# Altium PCB Probe-Scope v1.0.PcbDoc (part 2 of 2)
Units mil, origin at the board's own origin, x right, y up, seen from the top; angles counter-clockwise.
Board outline 2550 x 850 mil, 6 copper layers (Top Layer, Signal Layer 1, Signal Layer 2, Ground Plane, Power Layer, Bottom Layer), stack 48.468 mil thick; 135 components, 135 nets, 640 pads, 373 vias.
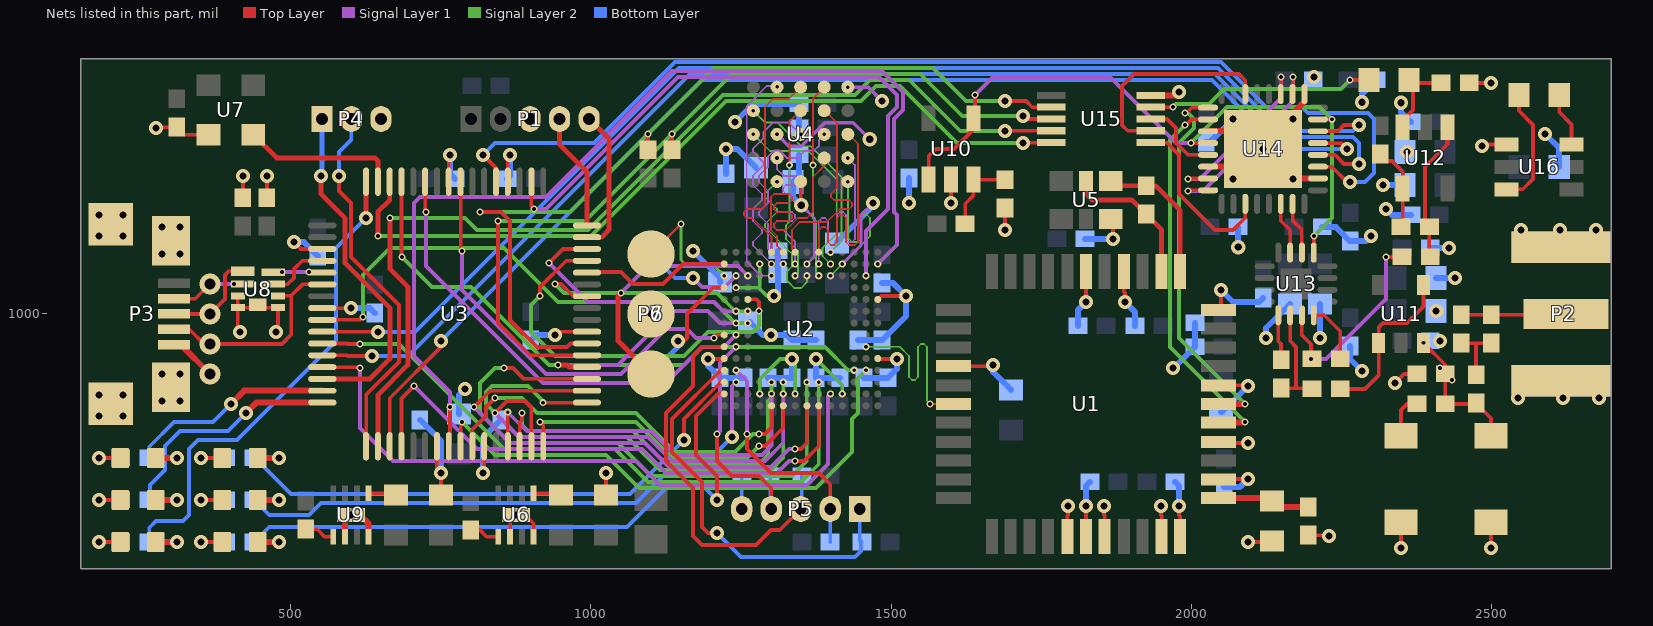
[diagram p6: the nets of this part, all layers, seen from the top]

## Via types
v1: diameter 24, hole 12, Top Layer to Bottom Layer, tented both sides, 222 vias
v2: diameter 12, hole 6, Top Layer to Signal Layer 2, tented both sides, 88 vias
v3: diameter 12, hole 6, Top Layer to Signal Layer 1, tented both sides, 58 vias
v4: diameter 35, hole 19, Top Layer to Bottom Layer, tented both sides, 5 vias

## Nets (pads, with @x,y where several pads share a name; then routed paths per layer and width w, separated by ;. In a path a pad name is that pad's centre, name@x,y a point inside that pad or via, vN(x,y) a via of type N, cw(c..) or ccw(c..) an arc to the next point about the centre after c; other vN are vias at no path point) (continued)
ADC_DCO_P: U1.17 U2.N6 | length 337.5
  Top Layer w3: v2(1565,850) U1.17@1604,850
  Signal Layer 2 w3: v2(1458.27,945.47) 1514.53,945.47 1530,930 1530,895 1535,890 1540,890 1545,895 1545,945 1550,950 1555,950 1560,945 1560,855 v2(1565,850)
ADC_OSC_N: R1.2 U1.2 U5.5 | length 241.2
  Top Layer w8: U5.5@1825,1221.5 1825,1200 1835,1190 1901.38,1190 R1.2@1925,1166.38 1951,1140.38 ; U1.2@1951,1071 1951,1140
ADC_OSC_P: R1.1 U1.1 U5.4 | length 237.7
  Top Layer w8: U5.4@1866.34,1221.5 1874.21,1213.62 R1.1@1925,1213.62 1941.38,1213.62 1982,1173 U1.1@1982,1071
D+: P3.3 U8.1 | length 167.5
  Top Layer w6: P3.3@305,1000 v4(365,1000) 390,1025 390,1065 396.5,1071.5 U8.1@419.41,1071.5
D+_filt: U3.37 U8.8 | length 45
  Signal Layer 1 w6: v3(485,1070) v3(530,1070)
D-: P3.2 U8.2 | length 110.1
  Top Layer w6: P3.2@305,1025.59 340.59,1025.59 v4(365,1050)
  Signal Layer 1 w6: v4(365,1050) v3(405,1050)
D-_filt: U3.36 U8.7 | length 122
  Top Layer w3: U8.7@455.16,1049.84 U8.7@470.59,1049.84
  Top Layer w6: U8.7@470.59,1049.84 494.84,1049.84 505,1060 505,1075 518.58,1088.58 U3.36@552.33,1088.58
DAC_RDY: U3.30 U15.5 | length 1364.1
  Top Layer w6: v1(1720,1285) 1720.63,1285.63 U15.5@1767.32,1285.63
  Top Layer w8: v2(645,1130) 645,1170 664.53,1189.53 U3.30@664.53,1220.47
  Signal Layer 2 w6: v2(645,1130) 1000,1130 1225,1355 1450,1355 1475,1380 1515.15,1380 1610.15,1285 v1(1720,1285)
FDIO0_N: P6.3 U2.B12 | length 151
  Signal Layer 1 w6: v1(1170,1060) 1185,1045 1223.15,1045 v2(1241.73,1063.58)
  Bottom Layer w6: P6.3@1115,1085 1140,1060 v1(1170,1060)
FDIO0_P: P6.1 U2.A11 | length 210.9
  Top Layer w6: v1(1145,955) 1155,955 1160,960 1160,1000 1203.9,1043.9 U2.A11@1222.05,1043.9
  Bottom Layer w8: P6.1@1100,900 1145,945 v1(1145,955)
FDIO1_N: P7.3 U2.A12 | length 213.7
  Top Layer w5: P7.3@1100,1100 v2(1150,1150)
  Signal Layer 2 w5: v2(1150,1150) 1150,1090 1160,1080 1205.63,1080 v2(1222.05,1063.58)
FDIO1_P: P7.1 U2.C12 | length 396.7
  Top Layer w8: v3(1050,1035) 1045,1030 1045,955 P7.1@1100,900
  Signal Layer 1 w6: v3(1050,1035) 1095,1080 1245,1080 v3(1261.42,1063.58)
FJ_TCK: P5.4 R15.2 U2.B6 | length 403.2
  Top Layer w6: v3(1210,800) 1210,755 1235,730 1280,730 1300.39,709.61 P5.4@1300.39,675
  Signal Layer 1 w6: v3(1210,800) 1215,805 1215,918.74 v3(1241.73,945.47)
  Bottom Layer w6: R15.2@1298.62,730 1298.62,676.77 P5.4@1300.39,675
FJ_TDI: P5.2 R13.1 U2.B4 | length 398.1
  Top Layer w6: v3(1260,800) 1260,775 1300,735 1380,735 1398.82,716.18 P5.2@1398.82,675
  Signal Layer 1 w6: v3(1241.73,906.1) 1260,887.83 v3(1260,800)
  Bottom Layer w6: R13.1@1398.62,620 1398.82,620.2 P5.2@1398.82,675
FJ_TDO: P5.1 R12.1 U2.A4 | length 683.2
  Top Layer w6: v1(1210,635) 1195,635 1185,645 1185,720 1135,770 1135,825 1216.1,906.1 U2.A4@1222.05,906.1
  Bottom Layer w6: v1(1210,635) 1250,595 1440,595 1450,605 1450,618.62 R12.1@1451.38,620 1448.03,623.35 P5.1@1448.03,675
FJ_TMS: P5.3 R14.1 U2.A6 | length 662.1
  Top Layer w6: U2.A6@1222.05,945.47 1185.47,945.47 1170,930 1170,880 1125,835 1125,755 1170,710 1170,630 1185,615 1275,615 1300,640 1314.61,640 P5.3@1349.61,675
  Bottom Layer w6: P5.3@1349.61,675 1351.38,676.77 R14.1@1351.38,730
FLED0: R9.2 U2.A3 | length 904.6
  Top Layer w6: v1(1155,790) 1155,825 1216.42,886.42 U2.A3@1222.05,886.42
  Bottom Layer w6: R9.2@440,760 500,700 1065,700 v1(1155,790)
FLED1: R10.2 U2.B3 | length 964.8
  Signal Layer 1 w6: v1(1235,795) 1235,879.69 v3(1241.73,886.42)
  Bottom Layer w6: R10.2@438.62,690 463.62,665 530,665 550,685 1075,685 1150,760 1200,760 v1(1235,795) ; R10.2@440,690 R10.2@450,690
FLED2: R11.2 U2.A2 | length 1037.8
  Top Layer w6: v1(1210,690) 1210,730 1175,765 1175,830 1211.73,866.73 U2.A2@1222.05,866.73
  Bottom Layer w6: R11.2@438.62,620 463.62,645 1060,645 1130,715 1185,715 v1(1210,690)
FPGA_DONE: U2.C10 U3.13 | length 655.1
  Top Layer w6: v2(915,1030) 915,1045 958.58,1088.58 U3.13@993.28,1088.58 ; U2.C10@1261.42,1024.21 1275.79,1024.21 1280,1020 v2(1280,1005)
  Signal Layer 2 w6: v2(915,1030) 900,1015 900,970 940,930 1155,930 1195,970 1270,970 1280,980 v2(1280,1005)
FPGA_I\N\I\T\: U2.B9 U3.14 | length 418
  Top Layer w6: v3(930,1085) 953.27,1108.27 U3.14@993.28,1108.27
  Signal Layer 1 w6: v3(930,1085) 995,1020 1205,1020 1220.47,1004.53 v3(1241.73,1004.53)
FPGA_P\R\O\G\R\A\M\: U2.A13 U3.12 | length 249.1
  Top Layer w6: U3.12@995,1070 1035,1070 1040,1070 1050,1070 1070,1050 1120,1050 1153.27,1083.27 U2.A13@1222.05,1083.27
FPIO0: U2.A7 U3.24 | length 714.9
  Top Layer w6: v3@782.65,1105 U3.24@782.65,1220.47 ; v3(1205,960) 1210.16,965.16 U2.A7@1222.05,965.16
  Signal Layer 1 w6: v3(785,1105) 785,1040 925,900 1050,900 1125,975 1160,975 1175,960 v3(1205,960)
FPIO1: U2.B7 U3.27 | length 771.8
  Top Layer w6: U3.27@723.59,1220.47 723.59,1171.41 v3(725,1170)
  Signal Layer 1 w6: v3(725,1170) 725,1080 920,885 1125,885 1185,945 1221.57,945 v3(1241.73,965.16)
FPIO2: U2.C8 U3.41 | length 851.6
  Top Layer w6: U3.41@552.33,990.16 615.16,990.16 v2(620,995)
  Signal Layer 2 w6: v2(620,995) 620,1065 665,1110 855,1110 945,1020 1205,1020 1240.16,984.84 v2(1261.42,984.84)
FPIO3: U2.B8 U3.4 | length 392.1
  Top Layer w8: v3(945,915) 960,915 963.58,911.42 U3.4@993.28,911.42
  Signal Layer 1 w6: v3(945,915) 1045,915 1135,1005 1195,1005 1215.16,984.84 v3(1241.73,984.84)
FPIO4: U2.C9 U3.10 | length 402
  Top Layer w6: v2(940,1050) 950,1050 970.47,1029.53 U3.10@993.28,1029.53
  Signal Layer 2 w6: v2(940,1050) 955,1035 1210,1035 1240.47,1004.53 v2(1261.42,1004.53)
GND: C1.1 C2.1 C3.1 C4.1 C5.1 C6.1 C7.1 C8.1 C9.1 C10.1 C11.1 C12.1 C13.1 C14.1 C15.1 C16.1 C17.1 C18.1 C19.1 C20.1 C21.1 C22.1 C23.1 C24.1 C25.1 C26.1 C27.1 C28.1 C29.1 C30.1 C31.1 C32.1 C33.1 C34.1 C35.1 C36.1 C37.1 C38.1 C39.1 C40.1 C41.1 C42.1 C43.1 C44.1 C45.1 C46.1 C47.1 C48.1 C49.1 C50.1 C51.1 C52.1 C53.1 C54.1 C55.1 C56.1 C57.1 C58.1 C59.1 C60.1 C61.1 C62.1 C63.1 C64.1 C65.1 C66.1 C67.1 C68.1 C70.1 C72.1 C74.1 C75.1 D1.2 D2.2 D3.2 D5.2 D6.2 D7.2 P1.3 P2.2 P3.5 P3.6 P4.3 P5.5 P6.2 P7.2 R7.1 R15.1 R27.1 U1.4 U1.6 U1.15 U1.27 U1.28 U1.29 U1.32 U1.33 U1.35 U1.37 U1.40 U1.44 U2.A5 U2.B11 U2.D2 U2.D13 U2.G2 U2.H13 U2.L2 U2.L13 U2.P5 U2.P10 U3.7 U3.20 U3.25 U3.35 U3.40 U3.55 U3.59 U4.B3 U4.C1 U4.E5 U5.3 U6.6 U6.8 U6.9 U7.2 U8.0 U8.3 U8.4 U8.5 U9.6 U9.8 U9.9 U10.2 U14.2 U14.9 U14.19 U14.22 U14.33 U15.10 U16.1 | length 6716.2
  Top Layer w6: v1(275,1310) 276.38,1311.38 C10.1@310,1311.38 322.72,1298.66 U7.2@362.6,1298.66 ; U8.4@411.54,1010.47 U8.5@478.46,1010.47 478.46,973.46 v1(475,970) ; U8.3@411.54,1030.16 411.54,973.46 v1(415,970) ; C12.1@420,1193.62 v1(420,1230) ; C13.1@460,1193.62 v1(460,1230) ; v1(505,1120) 516.73,1108.27 U3.35@552.33,1108.27 ; U3.40@552.33,1009.84 599.84,1009.84 v1(600,1010) ; U3.55@743.28,779.53 743.28,741.72 v1(750,735) C70.1@750,698.46 ; U3.25@762.96,1220.47 762.96,1262.96 v1(765,1265) ; v1(820,735) 822.02,737.02 U3.59@822.02,779.53 ; U3.20@861.39,1220.47 861.39,1261.39 v1(865,1265) ; U6.6@865.16,628.98 865.16,655.16 v1(875,665) 890,665 904.53,650.47 U6.8@904.53,628.98 ; v1(940,965) 945.47,970.47 U3.7@993.28,970.47 ; C25.1@1025,698.46 v1(1025,735) ; v1(1195,925) 1222.83,925 U2.A5@1222.05,925.79 ; U4.C1@1349.37,1220.63 1349.37,1182.13 v1(1350.39,1181.1) ; U2.P5@1477.95,925.79 1478.74,925 v1(1510,925) ; U2.P10@1477.95,1024.21 1483.74,1030 v1(1525,1030) ; v1(1600,1185) U10.2@1600,1223.82 ; U1.15@1604,913 1668,913 v1(1670,915) ; v1(1690,1140) R7.1@1690,1176.38 ; U1.27@1794,629 1794,664 1795,665 v1(1795,680) ; U1.28@1825,629 v1(1825,680) ; v1(1825,1020) U1.6@1825,1071 ; v1(1855,680) 1855,665 1856,664 U1.29@1856,629 ; U5.3@1866.34,1158.5 1870,1154.84 v1(1870,1125) ; U1.4@1888,1071 1888,1037 1890,1035 v1(1890,1020) ; v1(1950,680) 1950,665 1951,664 U1.32@1951,629 ; v1(1980,680) 1980,665 1982,663 U1.33@1982,629 ; U1.35@2046,724 2047,725 v1(2095,725) ; U1.37@2046,787 2044,785 v1(2095,785) ; U1.40@2046,881 2084,881 2090,887 2095,882 v1(2095,880) ; U1.44@2046,1007 2048,1007 2050,1005 v1(2050,1040) ; v1(2095,620) 2133.46,620 C24.1@2135,621.54 ; C9.1@2195,631.38 2228.62,631.38 v1(2230,630) ; v1(2340,885) 2355,900 R27.1@2376.38,900 ; v1(2350,610) C75.1@2350,652.66 ; C35.1@2463.62,1385 v1(2500,1385) ; v1(2485,1280) 2487.4,1282.4 U16.1@2525.87,1282.4 ; v1(2500,610) C74.1@2500,652.66
  Top Layer w10: D3.2@274.53,620 v1(310,620) ; D2.2@274.53,690 v1(310,690) ; D1.2@274.53,760 v1(310,760) ; P3.5@305,948.82 316.18,948.82 v4(365,900) ; D7.2@444.53,620 v1(480,620) ; D6.2@444.53,690 v1(480,690) ; D5.2@444.53,760 v1(480,760) ; U9.6@590.16,628.98 590.16,655.16 v1(600,665) 615,665 629.53,650.47 U9.8@629.53,628.98 ; v1@1165,1100 v1(1170,1105) ; U15.10@1932.68,1364.37 1974.37,1364.37 v1(1980,1370) ; U14.22@2028.46,1245.47 2090.47,1245.47 v1(2120,1275) ; U14.19@2028.46,1304.53 2090.47,1304.53 v1(2120,1275) ; U14.9@2188.9,1366.54 2188.9,1353.9 2120,1285 v1(2120,1275) ; U14.2@2211.54,1225.79 2169.21,1225.79 v1(2120,1275)
  Signal Layer 1 w5: v1(1350.39,1181.1) 1372.5,1159 1372.5,1095.93 v3(1359.84,1083.27) ; v3(1418.9,1083.27) 1449.77,1114.14 1449.77,1164.77 v1(1470,1185)
  Signal Layer 1 w6: v2(1310,1299.37) 1329.84,1279.53 1350.39,1279.53 1389.76,1318.9 1437.01,1318.9 v1(1464.57,1291.34) ; v2(1428.11,1378.11) 1461.89,1378.11 v1(1485,1355)
  Signal Layer 2 w6: v2(1241.73,1043.9) 1279.53,1043.9 ; v2(1281.1,866.73) 1281.1,891.1 1315,925 1334.84,925 v1@1335,924.84 ; v2(1281.1,1083.27) 1281.1,1045.47 1279.53,1043.9 ; v1(1305,1030) 1293.43,1030 1279.53,1043.9 ; v1(1335,925) v1@1335,924.84 ; v2(1340.16,866.73) 1340.16,919.68 v1@1335,924.84 ; v1@1375.16,924.84 1418.9,881.1 v2(1418.9,866.73)
  Bottom Layer w6: P5.5@1251.18,675 1251.38,675.2 R15.1@1251.38,730
  Bottom Layer w10: v1(505,1120) 521.38,1120 C18.1@545,1096.38 ; v1(600,1010) 631.38,1010 C19.1@640,1001.38 ; C16.1@715,823.62 750,788.62 v1(750,735) ; v1(765,1265) 765,1233.62 C14.1@773.62,1225 ; C30.1@780,833.46 780,865 v1(790,875) ; v1(820,735) 820,793.62 C15.1@850,823.62 ; C17.1@860,1225 865,1230 v1(865,1265) ; C20.1@900,956.38 908.62,965 v1(940,965) ; v1@1165,1100 v1(1170,1105) 1215,1060 C57.1@1215,1053.46 ; v1(1195,925) 1195,913.62 C47.1@1215,893.62 C48.1@1255,893.62 ; C51.1@1225,1233.62 v1(1225,1275) 1243.46,1275 C53.1@1275,1243.46 ; v1(1240,1320) 1270,1350 C23.1@1346.38,1350 C21.1@1346.38,1310 ; C61.1@1265,986.54 1286.54,965 v1(1300,965) 1326.38,965 C59.1@1335,956.38 C43.1@1375,956.38 ; C56.1@1295,893.62 C60.1@1335,893.62 v1(1335,925) ; v1(1305,1030) 1311.38,1036.38 C52.1@1311.38,1065 C50.1@1311.38,1105 ; C22.1@1346.38,1265 1346.38,1229.84 C29.1@1336.54,1220 1336.54,1194.96 v1(1350.39,1181.1) ; v1(1375,925) C41.1@1375,893.62 C44.1@1415,893.62 ; C49.1@1410,1118.46 1410,1120 1470,1180 v1(1470,1185) ; C55.1@1445,956.38 C58.1@1485,956.38 1525,996.38 v1(1525,1030) 1503.62,1051.38 C54.1@1485,1051.38 ; C42.1@1455,893.62 C46.1@1495,893.62 1510,908.62 v1(1510,925) ; v1(1530,1185) C64.1@1530,1226.38 ; v1@1670,903.46 C28.1@1700,873.46 ; C1.1@1811.38,980 1811.38,1006.38 v1(1825,1020) ; C8.1@1823.62,1125 v1(1870,1125) ; v1(1825,680) 1825,713.62 C7.1@1831.38,720 ; v1(1890,1020) 1906.38,1003.62 C5.1@1906.38,980 ; v1(1970,910) 1971.38,910 C2.1@2006.38,945 C3.1@2006.38,985 ; C4.1@1973.62,720 1980,713.62 v1(1980,680) ; C11.1@2025,1286.38 2031.38,1286.38 v1(2070,1325) ; C27.1@2050,836.54 2051.54,836.54 v1(2095,880) ; v1(2050,1040) 2070,1020 2113.62,1020 C38.1@2120,1026.38 ; C6.1@2055,711.38 2081.38,711.38 v1(2095,725) ; v1(2078.62,1111.38) C34.1@2078.62,1145 ; v1(2125,960) 2125,976.54 C39.1@2165,1016.54 ; v1(2215,960) C37.1@2215,1016.54 ; C31.1@2218.62,1145 2241.38,1145 C33.1@2265,1121.38 2291.38,1121.38 v1(2300,1130) ; C36.1@2265,946.38 2265,925 v1(2285,905) ; v1(2285,1353) 2285,1366.38 C32.1@2308.62,1390 ; v1(2320,1215) C62.1@2356.54,1215 ; v1(2325,1175) 2335,1165 C40.1@2366.38,1165 ; v1(2350,1352) 2350,1336.38 C65.1@2366.38,1320 ; C45.1@2398.62,1110 v1(2430,1110) ; C63.1@2408.46,1060 v1(2440,1060) ; v1(2590,1300) 2613.46,1276.54 C72.1@2613.46,1245
  other v1: 180,830 220,830 285,855 315,855 2545,860 2620,860 2680,860 180,865 220,865 285,900 315,900 2415,955 1100,1000 2408.46,1005 285,1100 315,1100 180,1130 220,1130 2550,1140 2615,1140 2675,1140 285,1145 315,1145 180,1165 220,1165 2070,1225 2170,1225 2360,1270 2170,1325 2205,1395
L\D\A\C\: U3.50 U15.4 | length 1663.2
  Top Layer w6: v1(1690,1305) 1690.31,1305.31 U15.4@1767.32,1305.31
  Top Layer w8: U3.50@644.85,779.53 644.85,864.85 695,915 695,1045 665,1075 v2(665,1160)
  Signal Layer 2 w6: v2(665,1160) 790,1160 810,1140 995,1140 1220,1365 1440,1365 1465,1390 1530.6,1390 1615.6,1305 v1(1690,1305)
LED0: R4.1 U3.47 | length 350.2
  Top Layer w10: v1(400,850) 422.05,872.05 U3.47@552.33,872.05
  Bottom Layer w6: R4.1@273.62,760 263.62,770 263.62,778.62 305,820 370,820 v1(400,850)
LED1: R5.1 U3.48 | length 392.7
  Top Layer w10: v1(425,835) 442.36,852.36 U3.48@552.33,852.36
  Bottom Layer w6: R5.1@265,690 265,715 290,740 290,780 315,805 395,805 v1(425,835)
LED2: R6.1 U3.32 | length 814.7
  Top Layer w8: v1(625,1160) 625.16,1160.16 U3.32@625.16,1220.47
  Bottom Layer w6: R6.1@263.62,620 263.62,643.62 275,655 320,655 330,665 330,775 345,790 410,790 575,955 575,1110 v1(625,1160)
MEM_C\S\: U2.K13 U4.A3 | length 326.3
  Signal Layer 2 w3: v2(1270.63,1299.37) 1298.35,1271.65 1362.2,1271.65 1409.45,1224.41 1409.45,1133.86 1385.83,1110.24 1385.83,1096.65 v2(1399.21,1083.27)
MEM_CK_N: U2.H12 U4.B1 | length 265.1
  Signal Layer 2 w3: v2(1310,1220.63) 1290,1200.63 1290,1195 1310,1175 1310,1170 1290,1150 1290,1145 1335,1100 1335,1079.09 1326.77,1070.87 1326.77,1055.12 1338.58,1043.31 1350.39,1043.31 1359.84,1052.76 v2(1359.84,1063.58)
MEM_CK_P: U2.G13 U4.B2 | length 353.8
  Signal Layer 1 w3: v3(1310,1260) 1310,1241.18 1321.18,1230 1350,1230 1355,1225 1355,1220 1350,1215 1325,1215 1320,1210 1320,1205 1325,1200 1330,1200 1335,1195 1335,1190 1330,1185 1310,1185 1305,1180 1305,1175 1310,1170 1335,1170 1340,1165 1340,1160 1335,1155 1310,1155 1305,1150 1305,1145 1310,1140 1320.63,1140 1340.16,1120.47 v3(1340.16,1083.27)
MEM_D0: U2.F13 U4.D3 | length 339.7
  Signal Layer 1 w3: v2(1320.47,1083.27) 1295,1108.74 1295,1150 1280,1165 1280,1170 1295,1185 1295,1205 1280,1220 1280,1230 1295,1245 1295,1262.52 1305.12,1272.64 1313.9,1272.64 1326.54,1260 1345,1260 1357.52,1272.52 1372.52,1272.52 1380,1280 1380,1290 v2@1388.74,1298.74
  other v2: 1388.74,1299.37
MEM_D1: U2.F14 U4.D2 | length 440.2
  Top Layer w3: U2.F14@1320.47,1102.95 1310,1113.43 1310,1130 1300,1140 1300,1195 1305,1200 1330,1200 1335,1195 1335,1190 1330,1185 1310,1185 1305,1180 1305,1175 1310,1170 1330,1170 1335,1165 1335,1160 1330,1155 1310,1155 1305,1150 1305,1145 1310,1140 1325,1140 1345,1160 1360,1160 1370,1170 1370,1228.27 1389.37,1247.64 U4.D2@1389.37,1260.63
MEM_D2: U2.G12 U4.C4 | length 295.5
  Top Layer w3: v2(1330.71,1248.03) 1330.71,1320.08 U4.C4@1349.37,1338.74
  Signal Layer 2 w3: v2(1330.71,1248.03) 1330.71,1153.54 1325,1147.83 1325,1125 1345,1105 1345,1068.43 v2(1340.16,1063.58)
MEM_D3: U2.G14 U4.D4 | length 357
  Top Layer w3: U2.G14@1340.16,1102.95 1335,1108.11 1335,1140 1348.24,1153.24 1393.24,1153.24 1415,1175 1430,1175 1435,1180 1435,1185 1430,1190 1405,1190 1400,1195 1400,1200 1410,1210 1410,1318.74 U4.D4@1389.37,1339.37
MEM_D4: U2.J12 U4.D5 | length 326.2
  Top Layer w3: v2(1370.08,1248.03) 1370.08,1359.45 U4.D5@1388.74,1378.11
  Signal Layer 2 w3: v2(1370.08,1248.03) 1370.08,1159.92 1375,1155 1375,1068.11 v2(1379.53,1063.58)
MEM_D5: U2.J14 U4.E3 | length 405.5
  Top Layer w3: U2.J14@1379.53,1102.95 1379.53,1139.53 1385,1145 1390,1145 1395,1140 1395,1120 1400,1115 1405,1115 1410,1120 1410,1160 1415,1165 1420,1165 1425,1160 1425,1120 1430,1115 1440,1115 1445,1120 1445,1283.74 U4.E3@1428.74,1300
MEM_D6: U2.J13 U4.E2 | length 408.4
  Signal Layer 1 w3: v3(1379.53,1083.27) 1379.53,1154.53 1385,1160 1390,1160 1395,1155 1395,1120 1400,1115 1405,1115 1410,1120 1410,1165 1415,1170 1420,1170 1425,1165 1425,1125 1430,1120 1435,1120 1440,1125 1440,1248.11 v2(1428.11,1260)
MEM_D7: U2.K12 U4.E1 | length 298.4
  Signal Layer 2 w3: v2(1399.21,1063.58) 1465,1129.37 1465,1160 1460,1165 1455,1165 1450,1160 1450,1125 1445,1120 1435,1120 1428.11,1126.89 v2(1428.11,1220.63)
MEM_PSC_N: U2.E14 U4.C5 | length 369.6
  Top Layer w3: U2.E14@1300.79,1102.95 1300.79,1128.35 1269.13,1160 1260,1160 1255,1165 1255,1170 1260,1175 1285,1175 1290,1180 1290,1345.12 1303.15,1358.27 1329.53,1358.27 U4.C5@1350,1378.74
MEM_PSC_P: U2.E12 U4.B5 | length 374.7
  Signal Layer 1 w3: v3(1300.79,1063.58) 1282.87,1063.58 1259.5,1086.96 1259.5,1346.11 1293.39,1380 v2@1310,1380
  other v2: 1310.63,1378.74
MEM_R\E\S\E\T\: U2.K14 U4.A4 | length 325.3
  Signal Layer 2 w3: v2(1270.63,1338.74) 1290.47,1318.9 1311.02,1318.9 1350.39,1279.53 1366.14,1279.53 1417.32,1228.35 1417.32,1121.06 v2(1399.21,1102.95)
MEM_RWDS: U2.E13 U4.C3 | length 356
  Top Layer w3: U4.C3@1349.37,1299.37 U4.C3@1349.37,1299.37 v2(1349.41,1299.21)
  Signal Layer 1 w3: v2(1300.79,1083.27) 1270,1114.06 1270,1120 1285,1135 1285,1140 1270,1155 1270,1175 1285,1190 1285,1200 1270,1215 1270,1230 1287.4,1247.4 1287.4,1252.6 1270,1270 1270,1275 1287.4,1292.4 1287.4,1303.15 1303.15,1318.9 1329.72,1318.9 v2(1349.41,1299.21)
NetC35_2: C35.2 R8.2 U12.3 | length 159.1
  Top Layer w6: U12.3@2352.6,1311.18 2352.6,1322.6 2370,1340 2370,1378.46 R8.2@2363.46,1385 ; R8.2@2352.6,1379.13 R8.2@2363.46,1390 R8.2@2363.46,1385 ; C35.2@2416.38,1380 2411.38,1385 R8.2@2363.46,1385
NetC69_1: C69.1 U9.5 | length 50.6
  Top Layer w6: C69.1@525,641.38 543.62,641.38 556.02,628.98 U9.5@570.47,628.98
NetC71_1: C71.1 U6.5 | length 50
  Top Layer w6: C71.1@800,640 815,640 826.02,628.98 U6.5@845.47,628.98
NetC73_1: C73.1 U16.3 | length 201.1
  Top Layer w6: U16.3@2525.87,1207.6 2552.6,1207.6 2570,1225 2570,1315 2546.54,1338.46 C73.1@2546.54,1365
NetC73_2: C73.2 U16.6 | length 91.2
  Top Layer w6: C73.2@2613.46,1365 2613.46,1336.54 2634.13,1315.87 U16.6@2634.13,1282.4
NetC74_2: C74.2 R26.1 R27.2 R28.2 U11.3 | length 233.1
  Top Layer w6: v3(2387.4,951.77) 2423.62,915.55 R28.2@2423.62,850 2473.62,850 R26.1@2475,851.38 2500,826.38 C74.2@2500,797.34
  other v3: 2435,890 2415,910
NetC75_2: C75.2 R28.1 | length 73.2
  Top Layer w6: C75.2@2350,797.34 2350,840 2360,850 R28.1@2376.38,850
NetD1_1: D1.1 R4.2 | length 71.9
  Top Layer w6: v1(180,760) D1.1@215.47,760
  Bottom Layer w6: v1(180,760) R4.2@216.38,760
NetD2_1: D2.1 R5.2 | length 71.9
  Top Layer w6: v1(180,690) D2.1@215.47,690
  Bottom Layer w6: v1(180,690) R5.2@216.38,690
NetD3_1: D3.1 R6.2 | length 71.9
  Top Layer w6: v1(180,620) D3.1@215.47,620
  Bottom Layer w6: v1(180,620) R6.2@216.38,620
NetD5_1: D5.1 R9.1 | length 76.9
  Top Layer w6: v1(350,760) D5.1@385.47,760
  Bottom Layer w6: v1(350,760) R9.1@391.38,760
NetD6_1: D6.1 R10.1 | length 76.9
  Top Layer w6: v1(350,690) D6.1@385.47,690
  Bottom Layer w6: v1(350,690) R10.1@391.38,690
NetD7_1: D7.1 R11.1 | length 76.9
  Top Layer w6: v1(350,620) D7.1@385.47,620
  Bottom Layer w6: v1(350,620) R11.1@391.38,620
NetL1_1: L1.1 U9.1 | length 46.5
  Top Layer w6: U9.1@629.53,701.02 672.44,701.02 L1.1@675,698.46
NetL2_1: L2.1 U6.1 | length 46.5
  Top Layer w6: U6.1@904.53,701.02 947.44,701.02 L2.1@950,698.46
NetP2_1: P2.1 R24.2 R25.2 | length 175.6
  Top Layer w6: R25.2@2450,998.62 2623.62,998.62 P2.1@2625,1000
NetR2_1: R2.1 R7.2 U10.3 | length 117.2
  Top Layer w6: 1623.62,1165 1623.62,1183.62 1637.4,1197.4 U10.3@1637.4,1223.82 1689.8,1223.82 R7.2@1690,1223.62
NetR8_1: R8.1 U15.9 | length 382.6
  Top Layer w6: U15.9@1932.68,1344.69 1969.69,1344.69 v2(1970,1345) ; v2(2265,1390) R8.1@2296.54,1390
  Signal Layer 2 w6: v2(1970,1345) 1975,1350 2030,1350 2055,1375 2250,1375 v2(2265,1390)
NetR18_2: R18.2 R19.1 U12.4 | length 143.1
  Top Layer w6: R18.2@2315,1266.38 2326.38,1255 2335,1255 2352.6,1237.4 U12.4@2352.6,1208.82 2352.6,1147.6 R19.1@2350,1145
NetR19_2: R19.2 R20.1 U12.1 | length 235.2
  Top Layer w6: R20.1@2398.62,1095 2397.24,1096.38 R19.2@2397.24,1145 2390,1152.24 2390,1245.46 2427.4,1282.86 U12.1@2427.4,1311.18
NetR20_2: R20.2 R21.1 U13.3 | length 341.9
  Top Layer w6: U13.3@2184.84,997.83 2184.84,964.7 2200,949.54 v3(2200,925) ; v3(2325,1095) R20.2@2351.38,1095
  Signal Layer 1 w6: v3(2200,925) 2225,925 2325,1025 v3(2325,1095)
NetR21_2: R21.2 U13.4 | length 101.4
  Top Layer w6: U13.4@2204.53,997.83 2222.17,997.83 2248.62,971.38 R21.2@2248.62,925
NetR22_1: R22.1 U11.1 U11.4 | length 278.4
  Top Layer w6: R22.1@2248.62,875 2290,875 2312.6,897.6 U11.1@2312.6,951.77 2312.6,977.6 2320,985 2360,985 2387.4,1012.4 U11.4@2387.4,1048.23
NetR22_2: R22.2 R23.1 U13.2 | length 177.5
  Top Layer w6: R23.1@2150,876.38 2175,876.38 ; U13.2@2165.16,997.83 2165.16,954.84 2175,945 2175,876.38 ; R22.2@2201.38,875 2200,876.38 2175,876.38
NetR23_2: R23.2 U13.1 | length 76.1
  Top Layer w6: U13.1@2145.47,997.83 2145.47,954.53 2150,950 R23.2@2150,923.62
NetR24_1: R24.1 R25.1 R26.2 | length 102.8
  Top Layer w6: R25.1@2450,951.38 2475,951.38 ; R26.2@2475,898.62 2475,951.38 ; R24.1@2500,951.38 2475,951.38
NetU13_10: U13.10 U14.31 | length 87.8
  Top Layer w6: U14.31@2169.21,1183.46 2169.21,1155.79 2184.84,1140.16 U13.10@2184.84,1102.17
NetU13_11: U13.11 U14.30 | length 87.8
  Top Layer w6: U14.30@2149.53,1183.46 2149.53,1155.47 2165.16,1139.84 U13.11@2165.16,1102.17
NetU14_10: U14.10 U14.24 | length 339.8
  Top Layer w6: v3(1995,1205) 1996.1,1206.1 U14.24@2028.46,1206.1 ; U14.10@2169.21,1366.54 2169.21,1394.21 v3(2170,1395)
  Signal Layer 1 w6: v3(1995,1205) 2020,1205 2170,1355 v3(2170,1395)
NetU14_11: U14.11 U14.23 | length 308.4
  Top Layer w6: v3(1995,1225) 1995.79,1225.79 U14.23@2028.46,1225.79 ; U14.11@2149.53,1366.54 2149.53,1394.53 v3(2150,1395)
  Signal Layer 1 w6: v3(1995,1225) 2015,1225 2150,1360 v3(2150,1395)
NetU14_14: U14.14 U15.7 | length 357.8
  Top Layer w6: U15.7@1932.68,1305.31 1894.69,1305.31 1885,1315 1885,1380 1905,1400 2080,1400 2090.47,1389.53 U14.14@2090.47,1366.54
NetU14_21: U14.21 U15.8 | length 135.2
  Top Layer w6: U15.8@1932.68,1325 1960,1325 1975,1310 1975,1285 1994.84,1265.16 U14.21@2028.46,1265.16
NetU14_27: U14.27 U15.6 | length 287.7
  Top Layer w6: U15.6@1932.68,1285.63 1959.37,1285.63 1980,1265 1980,1200 2040,1140 2070,1140 2090.47,1160.47 U14.27@2090.47,1183.46
OSC24: U3.31 U7.3 | length 260.1
  Top Layer w8: U7.3@437.4,1298.66 476.06,1260 640,1260 644.85,1255.15 U3.31@644.85,1220.47
PGC: P1.5 U3.15 | length 240.4
  Top Layer w8: U3.15@993.28,1127.95 1017.95,1127.95 1030,1140 1030,1291.85 P1.5@996.85,1325
PGD: P1.4 U3.16 | length 196.3
  Top Layer w8: P1.4@947.64,1325 947.64,1282.36 993.28,1236.72 U3.16@993.28,1147.64
PMCS1: U2.K2 U3.45 | length 1115.6
  Top Layer w6: U3.45@552.33,911.42 613.58,911.42 v3(615,910)
  Signal Layer 1 w6: v3(615,910) 615,810 670,755 1075,755 1115,715 1360,715 1395,750 1395,862.52 v3(1399.21,866.73)
PMD0: U2.E1 U3.58 | length 647.3
  Top Layer w6: U3.58@802.33,779.53 802.33,807.33 825,830 825,845 v2(840,860) ; v2(1280,800) 1290,800 1300.79,810.79 U2.E1@1300.79,847.05
  Signal Layer 2 w6: v2(840,860) 885,860 910,835 1075,835 1140,770 1240,770 1270,800 v2(1280,800)
PMD1: U2.E2 U3.61 | length 618.3
  Top Layer w6: U3.61@861.39,779.53 v3(861.39,836.39)
  Signal Layer 1 w6: v3(861.39,836.39) 892.77,805 1100,805 1140,765 1285,765 1300.79,780.79 v3(1300.79,866.73)
PMD2: U2.E3 U3.62 | length 644.1
  Top Layer w6: U3.62@881.07,779.53 881.07,818.93 885,822.86 v2(885,835)
  Signal Layer 2 w6: v2(885,835) 885,815 895,805 1070,805 1125,750 1280,750 1295,765 1295,855 1300.79,860.79 v2(1300.79,886.42)
PMD3: U2.F2 U3.63 | length 745.7
  Top Layer w6: v3(840,835) 860,855 890,855 900.76,844.24 U3.63@900.76,779.53
  Signal Layer 1 w6: v3(840,835) 880,795 1095,795 1135,755 1290,755 1320.47,785.47 v3(1320.47,866.73)
PMD4: U2.F1 U3.64 | length 530.5
  Top Layer w6: v2(915,820) 920.44,814.56 U3.64@920.44,779.53 ; v2(1280,780) 1290,780 1320.47,810.47 U2.F1@1320.47,847.05
  Signal Layer 2 w6: v2(915,820) 1075,820 1135,760 1260,760 v2(1280,780)
PMD5: U2.F3 U3.1 | length 880.9
  Top Layer w6: v2(920,852.36) U3.1@993.28,852.36
  Signal Layer 2 w6: v2(920,852.36) 920,855 895,880 835,880 825,870 825,850 880,795 1060,795 1115,740 1300,740 1320.47,760.47 v2(1320.47,886.42)
PMD6: U2.H1 U3.2 | length 874.5
  Top Layer w6: v3(805,845) 832.05,872.05 U3.2@993.28,872.05 ; v2(1340,775) 1350,775 1359.84,784.84 U2.H1@1359.84,847.05
  Signal Layer 1 w6: v3(805,845) 865,785 1090,785 1130,745 1300,745 1330,775 v2(1340,775)
PMD7: U2.H3 U3.3 | length 976.4
  Top Layer w6: v2(855,910) 870,910 888.27,891.73 U3.3@993.28,891.73
  Signal Layer 2 w6: v2(855,910) 840,910 815,885 815,835 865,785 1045,785 1100,730 1335,730 1359.84,754.84 v2(1359.84,886.42)
PMDC: U2.J3 U3.43 | length 1071.9
  Top Layer w6: U3.43@552.33,950.79 594.21,950.79 595,950 v2(615,950)
  Signal Layer 2 w6: v2(615,950) 680,950 855,775 1040,775 1095,720 1350,720 1379.53,749.53 v2(1379.53,886.42)
PMENB: U2.J1 U3.52 | length 929.6
  Top Layer w6: U3.52@684.22,779.53 684.22,859.22 v3(705,880) ; v2(1340,755) 1355,755 1379.53,779.53 U2.J1@1379.53,847.05
  Signal Layer 1 w6: v3(705,880) 810,775 1085,775 1125,735 1310,735 1330,755 v2(1340,755)
S\S\3\: U2.N12 U3.18 | length 1078.6
  Top Layer w6: U3.18@900.76,1220.47 900.76,1179.24 v3(905,1175)
  Signal Layer 1 w6: v3(905,1175) 925,1175 1145,1395 1480,1395 1510,1365 1510,1345 1495,1330 1495,1175 1458.27,1138.27 v3(1458.27,1063.58)
S\S\4\: U3.21 U14.3 | length 1842.3
  Top Layer w6: v1(820,1265) 841.7,1243.3 U3.21@841.7,1220.47 ; U14.3@2211.54,1245.47 2234.53,1245.47 2260,1220 v1(2265,1220)
  Bottom Layer w6: v1(820,1265) 840,1285 1005,1285 1140,1420 2050,1420 2125,1345 2185,1345 2195,1335 2295,1335 2305,1325 2305,1235 2290,1220 v1(2265,1220)
SCK3: U2.M4 U3.29 | length 982.5
  Top Layer w6: U3.29@684.22,1220.47 684.22,1095.78 v2(685,1095)
  Signal Layer 2 w6: v2(685,1095) 735,1045 800,1045 930,915 1155,915 1185,945 1390,945 1428.9,906.1 v2(1438.58,906.1)
SCK4: U3.44 U14.4 | length 2080.2
  Top Layer w6: U3.44@552.33,931.1 593.9,931.1 595,930 v1(635,930) ; U14.4@2211.54,1265.16 2239.84,1265.16 2255,1250 v1(2280,1250)
  Bottom Layer w6: v1(635,930) 695,930 1165,1400 2040,1400 2145,1295 2270,1295 2280,1285 v1(2280,1250)
SCL4: R17.1 U3.6 U15.2 | length 1475.7
  Top Layer w6: v2(815,1170) 850,1170 865,1155 865,990 910,945 960,945 965.79,950.79 U3.6@993.28,950.79 ; R17.1@1095,1273.62 v2(1095,1300) ; v1(1690,1355) 1725,1355 1735.31,1344.69 U15.2@1767.32,1344.69
  Signal Layer 2 w6: v2(815,1170) 965,1170 v2(1095,1300) 1205,1410 1570,1410 1625,1355 v1(1690,1355)
SDA4: R16.1 U3.5 U15.3 | length 1421.8
  Top Layer w6: v2(845,1155) 845,985 898.9,931.1 U3.5@993.28,931.1 ; R16.1@1135,1273.62 v2(1135,1300) ; v1(1720,1330) 1725,1325 U15.3@1767.32,1325
  Signal Layer 2 w6: v2(845,1155) 990,1155 v2(1135,1300) 1235,1400 1548.89,1400 1618.89,1330 v1(1720,1330)
SDI3: U2.N4 U3.57 | length 907.6
  Top Layer w6: U3.57@782.65,779.53 782.65,817.65 v2(785,820)
  Signal Layer 2 w6: v2(785,820) 840,765 1025,765 1080,710 1375,710 1435,770 1435,825 1445,835 1445,892.83 v2(1458.27,906.1)
SDI4: U3.42 U14.6 | length 2030.4
  Top Layer w6: U3.42@552.33,970.47 v1@645,970.47 ; U14.6@2211.54,1304.53 2244.53,1304.53 2255,1315 v1(2280,1315)
  Bottom Layer w6: v1(645,970) 706.72,970 1146.72,1410 2045,1410 2150,1305 2270,1305 v1(2280,1315)
SDO3: U2.P13 U3.56 | length 1660.1
  Top Layer w6: U3.56@762.96,779.53 765,781.57 v3(765,845)
  Signal Layer 1 w6: v3(765,845) 765,870 705,930 705,1185 715,1195 925,1195 1135,1405 1485,1405 1520,1370 1520,1340 1505,1325 1505,1170 1510,1165 1510,1115.31 v3(1477.95,1083.27)
SDO4: U3.51 U14.5 | length 2001.2
  Top Layer w6: U3.51@664.53,779.53 664.53,859.53 750,945 v1(750,955) ; U14.5@2211.54,1284.84 2250.16,1284.84 v1(2260,1275)
  Bottom Layer w6: v1(750,955) 1185,1390 2035,1390 2150,1275 v1(2260,1275)
UART1_RX: P4.1 U3.46 | length 574.7
  Top Layer w8: v1(550,1230) 550,1200 590,1160 590,1085 665,1010 665,925 631.73,891.73 U3.46@552.33,891.73
  Bottom Layer w8: v1(550,1230) 551.57,1231.57 P4.1@551.57,1325
UART1_TX: P4.2 U3.49 | length 618.2
  Top Layer w6: v1(580,1230) 580,1205 600,1185 600,1095 680,1015 680,920 625.16,865.16 U3.49@625.16,779.53
  Bottom Layer w6: v1(580,1230) 580,1270 600.79,1290.79 P4.2@600.79,1325
USBID: P3.4 U3.38 U8.6 | length 358.3
  Top Layer w6: P3.4@305,974.41 330.59,974.41 355,950 v4(365,950) 485,950 500.16,965.16 500.16,1030.16 ; U8.6@478.46,1030.16 500.16,1030.16 ; U3.38@552.33,1049.21 519.21,1049.21 500.16,1030.16
VCM: U10.1 U10.4 U13.9 U14.7 U14.20 | length 1163.9
  Top Layer w6: U10.1@1562.6,1223.82 1562.6,1262.6 1575,1275 1605,1275 1637.4,1307.4 U10.4@1637.4,1326.18 1640,1328.78 v3(1640,1365) ; v2(2000,1285) 2028.31,1285 U14.20@2028.46,1284.84 ; U13.9@2204.53,1102.17 2205,1102.64 v2(2205,1130) ; U14.7@2211.54,1324.21 v2(2235,1324.21)
  Signal Layer 1 w6: v3(1640,1365) 1670,1395 1865,1395 1975,1285 v2(2000,1285)
  Signal Layer 2 w6: v2(2000,1285) 2060,1345 2214.21,1345 v2(2235,1324.21) 2235,1160 v2(2205,1130)
Vin_N: U1.38 U14.18 | length 643.8
  Top Layer w6: v2(1990,1315) 1991.57,1315 2000.79,1324.21 U14.18@2028.46,1324.21
  Top Layer w10: U1.38@2046,819 2089,819 v2(2090,820)
  Signal Layer 2 w6: v2(1990,1315) 1965,1290 1965,945 v2(2090,820)
Vin_P: U1.39 U14.17 | length 636.2
  Top Layer w6: v2(1990,1335) 1992.2,1335 2001.1,1343.9 U14.17@2028.46,1343.9
  Top Layer w10: U1.39@2046,850 v2(2090,850)
  Signal Layer 2 w6: v2(1990,1335) 1995,1335 2005,1325 2005,1310 1980,1285 1980,960 v2(2090,850)
Vref: C9.2 C24.2 U1.34 | length 155
  Top Layer w10: U1.34@2046,693 2130.46,693 C24.2@2135,688.46 2144.84,678.62 C9.2@2195,678.62
pads on no net: U2.A9 U2.A10 U2.B1 U2.B2 U2.B5 U2.B13 U2.B14 U2.C1 U2.C2 U2.C3 U2.C4 U2.C6 U2.C7 U2.C11 U2.C13 U2.C14 U2.D1 U2.D12 U2.F12 U2.G3 U2.H2 U2.K1 U2.K3 U2.L3 U2.L14 U2.M1 U2.M2 U2.M3 U2.M7 U2.M12 U2.M13 U2.M14 U2.N2 U2.N8 U2.N13 U2.N14 U2.P2 U2.P3 U3.11 U3.17 U3.22 U3.23 U3.28 U4.A1 U4.A2 U4.A5 U4.C2 U5.2 U6.3 U9.3 U13.17 U14.13 U14.15 U14.26 U14.28

## Polygon pours and split planes (outlines as drawn)
3V3 on Power Layer "3V3_L05_P000" (solid, pour order 0): 150,1425 2275,1425 2275,575 150,575
NetC74_2 on Signal Layer 1 "Signal Layer 1-NetC74_2" (solid, pour order 4): 2520,980 2430,980 2430,920 2445,920 2445,880 2375,880 2375,1030 2520,1030
GND on Ground Plane "GND_L04_P006" (solid, pour order 6): 150,1425 2700,1425 2700,575 150,575

## Other copper
Top Layer:
  text ".Layer_Name" at 7259.45,1937.87 h100
Signal Layer 1:
  text ".Layer_Name" at 7259.45,1755.04 h100
Signal Layer 2:
  text ".Layer_Name" at 7259.45,1575.04 h100
Power Layer:
  text ".Layer_Name" at 7259.45,1215.67 h100
Ground Plane:
  text ".Layer_Name" at 7259.45,1395.04 h100
Bottom Layer:
  text ".Layer_Name" at 7259.45,1035.67 h100

## Silkscreen, mask and mechanical layers (free items; w line width, h text height)
Top Overlay:
  text ".Layer_Name" at 7259.45,2297.87 h100
Bottom Overlay:
  text ".Layer_Name" at 7259.45,675.67 h100
Top Paste:
  text ".Layer_Name" at 7259.45,2477.87 h100
Bottom Paste:
  text ".Layer_Name" at 7259.45,495.67 h100
Top Solder:
  text ".Layer_Name" at 7259.45,2117.87 h100
Bottom Solder:
  text ".Layer_Name" at 7259.45,855.67 h100
Board Outline:
  the board outline again, w10
  text ".Layer_Name" at 7259.45,315.67 h100
Notes:
  text "Notes:" at 2765,4130 h60
  text "1. Base material is 0.062 thick FR4" at 2765,4040 h60
  text "2. Foils to finish at 1oz" at 2765,3955 h60
  text "3. All hole sizes are after plating" at 2765,3875 h60
  text "4. Soldermask with L.P.I, Color is Green" at 2765,3790 h60
  text "5. ENIG surface finish" at 2765,3700 h60
  text "6. Silkscreen with white epoxy" at 2765,3610 h60
  text "7. Holes with zero diameter pads are unplated" at 2765,3515 h60
  text "8. TXT drill file is normal through holes" at 2765,3420 h60
  text "9. TX1 drill file is blind microvias from Top to Layer 2 (G1)" at 2765,3330 h60
  text "10. TX2 drill file is blind microvias from Top to Layer 3 (G2)" at 2765,3235 h60
  text "11. All tented vias to be filled with epoxy and plated over" at 2765,3145 h60
Title Block:
  lines w5: -1900,-125 -1700,-125 ; -1900,2000 -1700,2000 ; -1900,4125 -1700,4125 ; 850,-2250 850,-2050 ; 850,6050 850,6250 ; 2175,-2050 2175,-1950 ; 3600,-2250 3600,-2050 ; 3600,6050 3600,6250 ; 4400,-1650 8900,-1650 ; 4400,-1350 8900,-1350 ; 4400,-1050 5900,-1050 ; 5900,-1950 5900,-1350 5900,-750 ; 6350,-2250 6350,-2050 ; 6350,6050 6350,6250 ; 8000,-1950 8000,-1350 ; 8900,-125 9100,-125 ; 8900,2000 9100,2000 ; 8900,4125 9100,4125 ; 2175,-1950 4400,-1950 ; 2175,-1950 2175,-750 4400,-750 ; 4400,-1950 8900,-1950 8900,-750 5900,-750 ; 4400,-1950 4400,-750 ; 4400,-750 5900,-750 ; -1900,-2250 9100,-2250 9100,6250 -1900,6250 -1900,-2250 ; -1700,-2050 -1700,6050 8900,6050 8900,-2050 -1700,-2050
  text "1" at -548.66,6115 h70
  text "2" at 2202,6115 h70
  text "3" at 4947,6115 h70
  text "4" at 7698.01,6115 h70
  text "A" at -1825,5097 h70
  text "A" at 8975,5097 h70
  text "B" at -1825,2972 h70
  text "B" at 8975,2972 h70
  text "C" at -1825,847 h70
  text "C" at 8975,847 h70
  text "ENGINEER:" at 4450,-850 h45
  text "TITLE:" at 5950,-850 h45
  text "J. Rowley, M. Omo" at 4500,-970 h70
  text "PCB DESIGNER:" at 4450,-1145 h45
  text "Kempton" at 4500,-1270 h70
  text "D" at -1825,-1273 h70
  text "D" at 8975,-1273 h70
  text "Probe-Scope" at 6000,-1325 h140
  text "DATE:" at 4450,-1450 h45
  text "PART NO.:" at 5950,-1450 h45
  text "REV:" at 8050,-1450 h45
  text "a" at 2640,-1550 h787.4
  text ".PRINT_DATE" at 4500,-1570 h70
  text ".revision" at 8100,-1570 h70
  text "ASP0100" at 5975,-1575 h70
  text "Unified USB Oscilloscope Probe" at 2250,-1725 h70
  text "SHEET SIZE:" at 4450,-1750 h45
  text "DWG NO:" at 5950,-1750 h45
  text "SCALE:" at 8050,-1750 h45
  text "Copyright 2019 M. Omo, J. Rowley, K. Hall" at 2243,-1855.33 h70
  text "1:1" at 8100,-1870 h70
  text "LETTER" at 4475,-1875 h70
  text "CAD0100" at 5975,-1875 h70
  text "Released under the CERN OHL v1.2" at 2243,-1955.33 h70
  text "FILE PATH:" at 2200,-2025 h45
  text ".PCB_FILE_NAME" at 2550,-2025 h45
  text "1" at -548.66,-2185 h70
  text "2" at 2202,-2185 h70
  text "3" at 4947,-2185 h70
  text "4" at 7698.01,-2185 h70

## Dimensions
150,1425 to 1100,1100 on Notes
2700,1425 to 150,1425 on Notes
150,1425 to 2700,1425 on Notes
150,1425 to 150,575 on Notes
150,1425 to 150,575 on Notes